# Altium PCB 555_PCB.PcbDoc
Units mm, origin at the board's own origin, x right, y up, seen from the top; angles counter-clockwise.
Board outline 31.4 x 20.2 mm, 2 copper layers (Top Layer, Bottom Layer); 7 components, 7 nets, 26 pads, 7 vias.
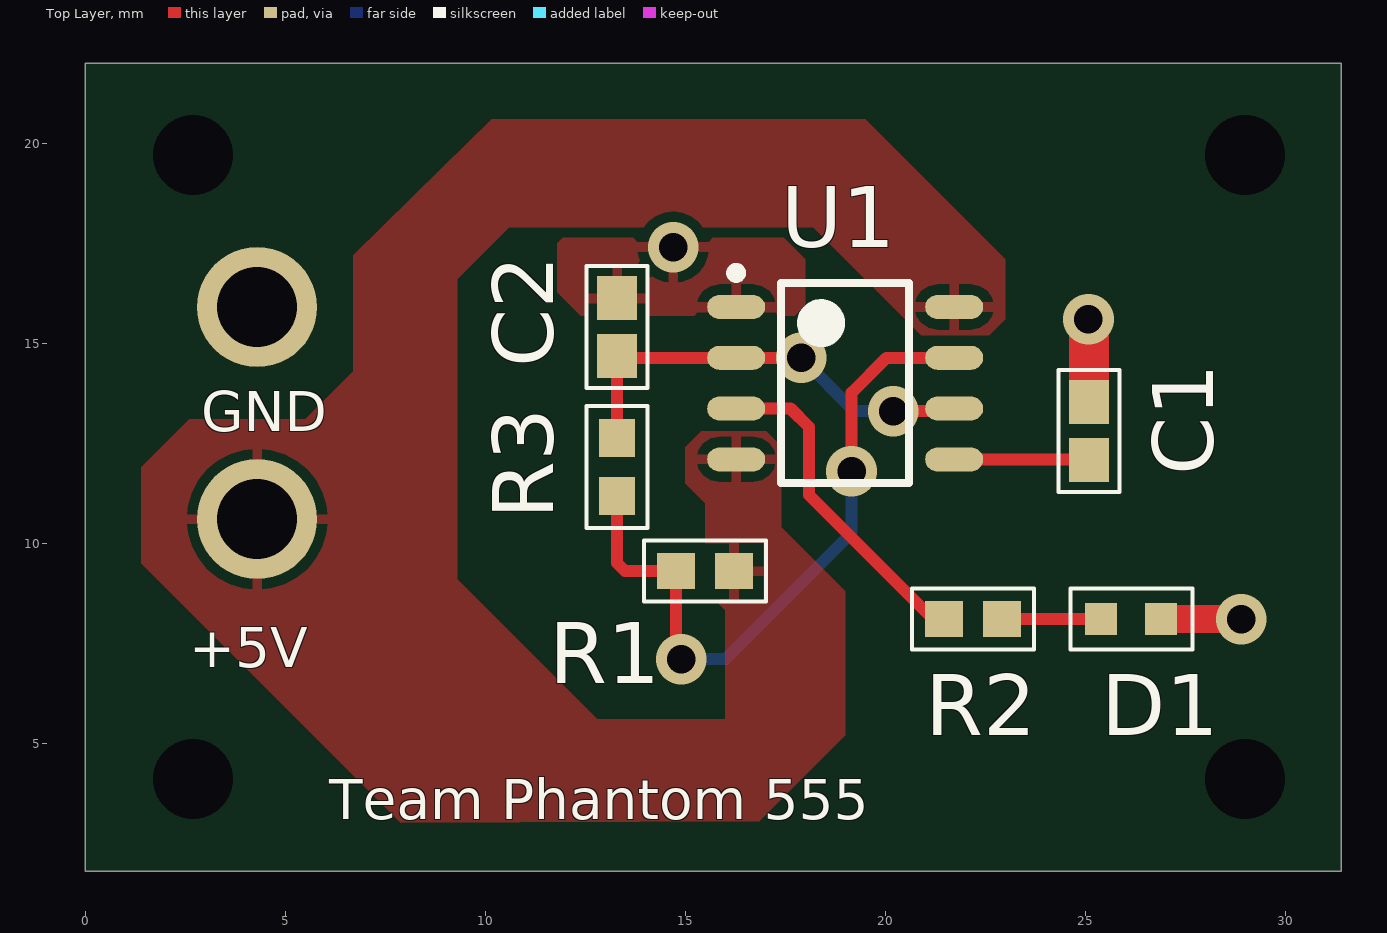
[diagram p0: Top Layer view]
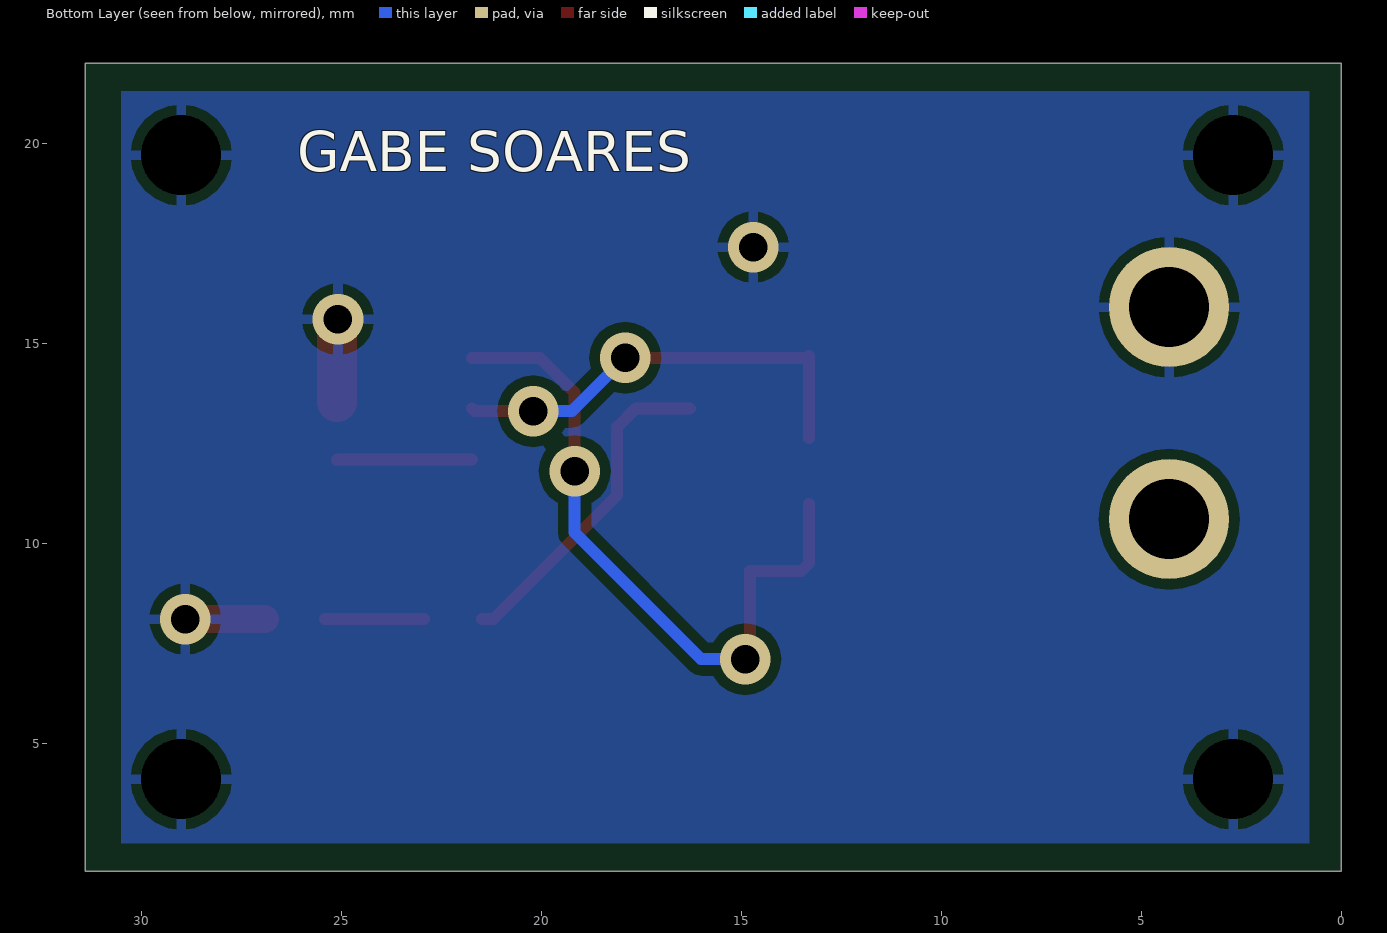
[diagram p1: Bottom Layer view, seen from below]
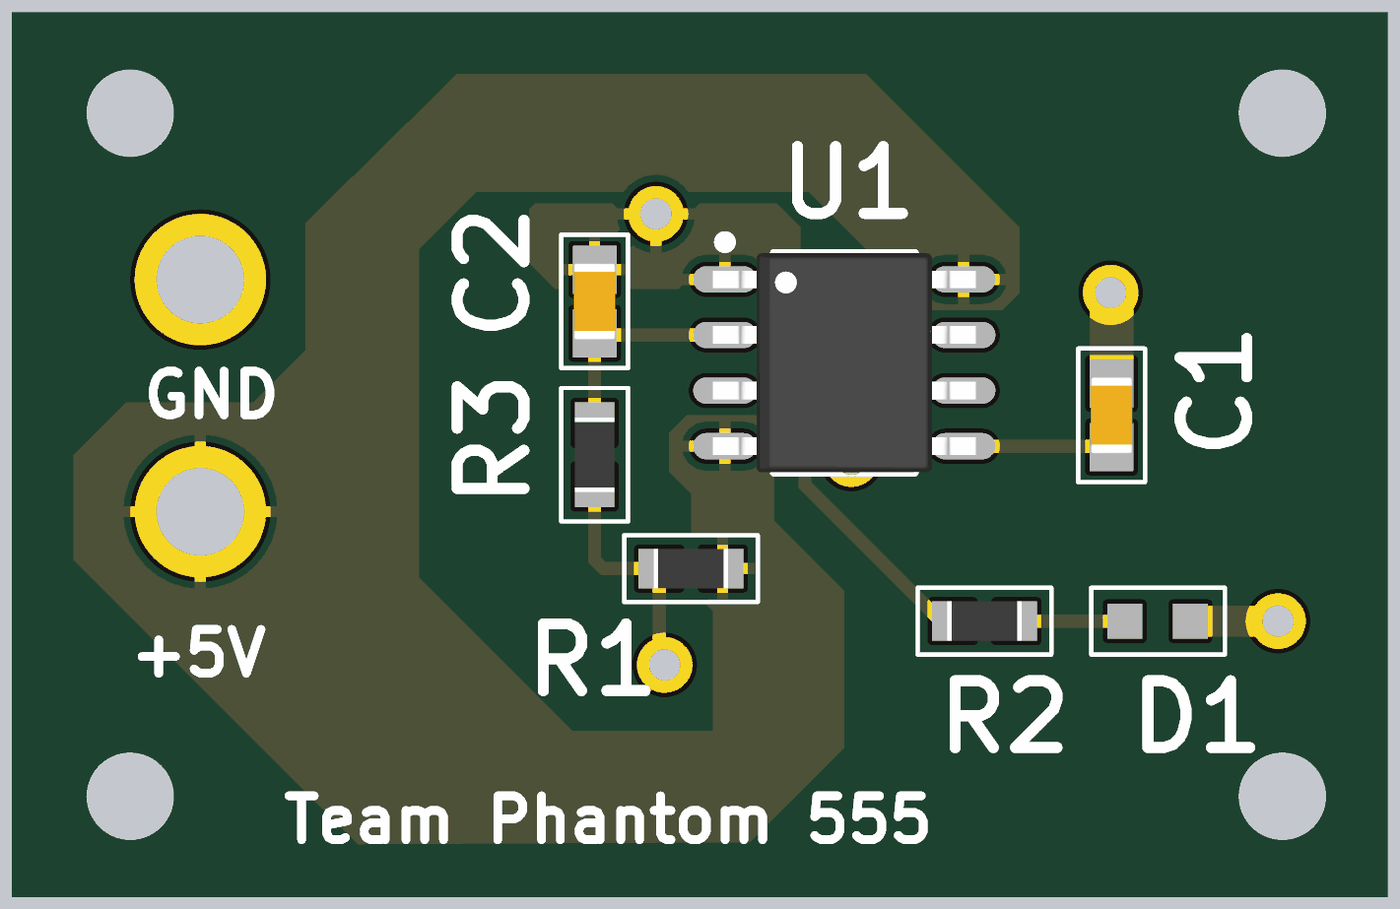
[diagram p2: 3D render of the assembled board from above, using the file's embedded part models]

## Layer stack, top to bottom
Top Solder: solder mask 0.0102, Solder Resist, Dk 3.5
Top Layer: signal copper 0.0356
Dielectric 1: dielectric 0.32, FR-4, Dk 4.8
Bottom Layer: signal copper 0.0356
Bottom Solder: solder mask 0.0102, Solder Resist, Dk 3.5

## Board outline
0,1.8 31.4,1.8 31.4,22 0,22

## Design rules (kind name [scope] priority, off if disabled: settings)
Clearance [All] p1: gap=0.254 ignorepadtopadclearanceinfootprint=FALSE except(0: Arc-Hole Track-Hole SMDPad-Hole THPad-Hole Via-Hole Fill-Hole Poly-Hole Region-Hole Text-Hole)
PolygonConnect [All] p1: connectstyle=Relief reliefconductorwidth=0.254 reliefentries=4 polygonreliefangle="90 Angle" airgapwidth=0.254
RoutingVias [All] p1: holewidth=0.711 width=1.27 viastyle="Through Hole" minholewidth=0.711 minwidth=1.27 maxholewidth=0.711 maxwidth=1.27
SolderMaskExpansion [All] p1: expansion=0.102
Width [All] p1: maxlimit=1 minlimit=0.2 preferedwidth=0.254 minimp=50.000000 maximp=50.000000 favimp=50.000000
30 further rules are at their usual default settings.

## Components (designator, comment, footprint, x,y, rotation, side; value= is the part's Value field where it differs from the comment)
C1 "10nF" C0603 25.1,12.8 r270 top
C2 "10uF" C0603 13.3,15.4 r270 top
D1 "LTST-C190GKT" LED_0603 25.4,8.1 r0 top
R1 "1k" R0603 15.5,9.3 r0 top
R2 "1k" R0603 22.2,8.1 r180 top
R3 "10k" R0603 13.3,11.9 r270 top
U1 "NE555S-13" SOIC-8 19,14 r0 top

## Footprints (in the part's own frame and the unit in brackets; to place one, negate y for a bottom-side part, rotate by r counter-clockwise, add the part's x,y. Pads: shape width x height; smd on the part's side, far side on the other; paste and mask are expansions set on the pad)
C0603 [mm] "Chip Capacitor, 2-Leads, Body 1.60x0.80mm, IPC Medium Density"
  rect 1.1x1 smd: 1(-0.725,0) 2(0.725,0)
  silkscreen extent -1.52,-0.76 1.52,0.76, body extent -0.87,-0.48 0.87,0.48, height 0.95
LED_0603 [mm]
  rect 0.8x0.8 smd: 1(0,0) 2(1.5,0)
  silkscreen extent -0.76,-0.76 2.29,0.76
R0603 [mm] "Chip Resistor, 2-Leads, Body 1.60x0.80mm, IPC Medium Density"
  rect 0.95x0.9 smd: 1(-0.725,0) 2(0.725,0)
  silkscreen extent -1.52,-0.76 1.52,0.76, body extent -0.85,-0.45 0.85,0.45, height 0.55
SOIC-8 [mm] "SOIC, 8-Leads, Body 4.90x3.90mm, Pitch 1.27mm, IPC Medium Density"
  oval 1.45x0.6 smd: 1(-2.725,1.905) 2(-2.725,0.635) 3(-2.725,-0.635) 4(-2.725,-1.905) 5(2.725,-1.905) 6(2.725,-0.635) 7(2.725,0.635) 8(2.725,1.905)
  silkscreen extent -2.85,-2.5 1.6,2.88, body extent -3,-2.5 3,2.5, height 1.75

## Part data
C1: library part CC0603KRX7R6BB103, "Cap Ceramic 0.01uF 10V X7R 10% SMD 0603 125C Paper T/R", Case/Package=0603, Dielectric=X7R, Manufacturer=Yageo, Max Operating Temperature=125°C, Min Operating Temperature=-55°C, Supplier Part Number 1=603-CC603KRX7R6BB103, Tolerance=10%, Voltage Rating=10V, Capacitance=10nF, Composition=Ceramic, Depth=0.8mm, Halogen Free="Halogen Free", Height=0.8mm, Lead Free="Lead Free", Length=0.063inch, Manufacturer Part Number=CC0603KRX7R6BB103, Mount="Surface Mount", Packaging="Tape and Reel", Pricing 1="1=0.1, 10=0.039, 50=0.039, 100=0.018, 1000=0.014, 10000=0.01 (USD)", Radiation Hardening=No, Stock 1=1987, Supplier 1=Mouser, Thickness=0.035inch, Voltage Rating (DC)=10V, Width=0.031inch
C2: library part GRM188R61A106KE69D, "Cap Ceramic 10uF 10V X5R 10% SMD 0603 85C Paper T/R", Case/Package=0603, Case Code (Metric)=1608, Dielectric=X5R, Manufacturer=Murata, Max Operating Temperature=85°C, Min Operating Temperature=-55°C, Supplier Part Number 1=81-GRM188R61A106KE9D, Tolerance=10%, Voltage=10V, Capacitance=10uF, Case Code (Imperial)=0603, Depth=0.8mm, Height=0.8mm, Lead Free="Lead Free", Length=1.6mm, Manufacturer Part Number=GRM188R61A106KE69D, Mount="Surface Mount", Packaging="Tape and Reel", Pricing 1="1=0.19, 10=0.131, 50=0.131, 100=0.066, 1000=0.04, 10000=0.029 (USD)", REACH SVHC="No SVHC", Stock 1=0, Supplier 1=Mouser, Thickness=0.037inch, Voltage Rating=10V, Voltage Rating (DC)=10V, Width=0.031inch
D1: "LED GREEN CLEAR 0603 SMD", Case/Package=0603, Case Code (Metric)=1608, Colour=Green, Current=1A, Forward Current=30mA, Forward Voltage=2.1V, Lens Colour=Clear,Colorless, Manufacturer="Vishay Lite-On", Max Operating Temperature=85°C, Min Operating Temperature=-55°C, Package Quantity=1, Power Dissipation=100mW, Reverse Voltage=5V, Supplier Part Number 1=160-1183-6-ND, Test Current=10mA, Voltage=2V, Case Code (Imperial)=0603, Depth=0.8mm, Dominant Wavelength=569nm, Height=0.8mm, Illumination Colour=Green, Lead Free="Lead Free", Length=1.6mm, Lens Style=Clear,Colorless,Diffused,Rectangular, Lens Transparency=Clear, Luminous Intensity=6mcd, Manufacturer Part Number=LTST-C190GKT, Mount="Surface Mount", Number of Elements=1, Number of LEDs=1, Number of Pins=2, Packaging="Tape and Reel", Power Rating=100mW, Pricing 1="1=0.27, 10=0.196, 25=0.1448, 100=0.1034, 250=0.07032, 500=0.06204, 1000=0.0486 (USD)", Radiation Hardening=No, Stock 1=1795364, Supplier 1=Digi-Key, Viewing Angle=130°, Wavelength=565nm, Width=0.8mm
R1 R2: library part ESR03EZPJ102, "RES SMD 1K OHM 5% 1/4W 0603", Case/Package=0603, Case Code (Metric)=1608, Manufacturer=Rohm, Max Operating Temperature=155°C, Max Power Dissipation=250mW, Min Operating Temperature=-55°C, Package Quantity=1, Resistance=1kR, Supplier Part Number 1=2103938, Temperature Coefficient=200ppm/°C, Tolerance=5%, Case Code (Imperial)=0603, Composition="Thick Film", Features="Automotive AEC-Q200", Height=0.022inch, Lead Free="Lead Free", Length=0.063inch, Manufacturer Part Number=ESR03EZPJ102, Number of Terminations=2, Packaging="Tape and Reel", Pricing 1="1=0.022, 250=0.0157, 750=0.0138, 1500=0.0122, 2500=0.011 (USD)", Stock 1=0, Supplier 1="Future Electronics", Width=0.031inch
R3: library part RR0816P-103-D, "RES SMD 10K OHM 0.5% 1/16W 0816", Case/Package=0603, Case Code (Metric)=1608, Manufacturer=Susumu, Max Operating Temperature=125°C, Max Power Dissipation=63mW, Min Operating Temperature=-55°C, Package Quantity=1, Resistance=10kR, Temperature Coefficient=25ppm/°C, Tolerance=0.5%, Voltage Rating=75V, Case Code (Imperial)=0603, Composition="Thin Film", Depth=0.8mm, Height=0.4mm, Lead Free="Lead Free", Length=1.6mm, Manufacturer Part Number=RR0816P-103-D, Number of Pins=2, Number of Terminations=2, Packaging="Tape and Reel", Power Rating=63mW, Pricing 1="1=0.09, 10=0.045, 25=0.0405, 100=0.0198, 250=0.0178, 500=0.016 (USD)", REACH SVHC=Unknown, Stock 1=7768, Supplier 1=Arrow, Supplier Part Number 1=RR0816P-103-D, Termination=SMD/SMT, Voltage Rating (DC)=75V, Weight=7.1E-05oz, Width=0.8mm
U1: "555 Type, Timer/Oscillator (Single) IC 500kHz 8-SOIC (0.154\", 3.90mm Width)", Case/Package=SO, Frequency=500kHz, High Level Output Current=-200mA, Low Level Output Current=200mA, Manufacturer=Diodes, Max Operating Temperature=70°C, Max Supply Voltage=16V, Min Operating Temperature=0°C, Min Supply Voltage=4.5V, Operating Supply Current=13mA, Package Quantity=2500, Quiescent Current=15mA, Supplier Part Number 1=NE555S-13DIDKR-ND, ComponentLink1Description=https://datasheet.ciiva.com/1232/ne555-sa555-na555-1232519.pdf, ComponentLink1URL=https://datasheet.ciiva.com/1232/ne555-sa555-na555-1232519.pdf, ComponentLink2Description=https://datasheet.ciiva.com/1232/ne555-sa555-na555-1232520.pdf, ComponentLink2URL=https://datasheet.ciiva.com/1232/ne555-sa555-na555-1232520.pdf, ComponentLink3Description=https://datasheet.ciiva.com/1232/ne555-sa555-na555-1232521.pdf, ComponentLink3URL=https://datasheet.ciiva.com/1232/ne555-sa555-na555-1232521.pdf, Contact Plating=Tin,Matte, Height=1.5mm, Lead Free="Lead Free", Length=4.95mm, Manufacturer Part Number=NE555S-13, Mount="Surface Mount", Number of Pins=8, Number of Timers/Counters=1, Packaging="Tape and Reel", Pricing 1="1=0.37, 10=0.303, 100=0.206, 500=0.15452, 1000=0.11588 (USD)", Radiation Hardening=No, REACH SVHC="No SVHC", Stock 1=2624, Supplier 1=Digi-Key, Weight=0.01787oz, Width=3.95mm

## Free pads (board coordinates)
  round 3 hole 2: 1(4.3,10.6) 2(4.3,15.9)
  round 0 hole 2 unplated: 6(2.7,19.7) 7(2.7,4.1) 8(29,4.1) 9(29,19.7)

## Via types
v1: diameter 1.27, hole 0.711, Top Layer to Bottom Layer, 7 vias

## Nets (pads, with @x,y where several pads share a name; then routed paths per layer and width w, separated by ;. In a path a pad name is that pad's centre, name@x,y a point inside that pad or via, vN(x,y) a via of type N, cw(c..) or ccw(c..) an arc to the next point about the centre after c; other vN are vias at no path point)
+5V: pad.1 R1.2 U1.4 U1.8
COMPARATOR: C1.2 U1.5 | length 3.4
  Top Layer w0.3: U1.5 25.08,12.095 C1.2
DISCHARGE: R1.1 R3.2 U1.7 | length 17.3
  Top Layer w0.3: R3.2@13.3,10.975 13.3,9.5 13.5,9.3 R1.1 14.775,7.225 v1(14.9,7.1) ; v1(19.161,11.8) 19.161,13.761 20.035,14.635 U1.7
  Bottom Layer w0.3: v1(14.9,7.1) 16,7.1 19.161,10.261 v1(19.161,11.8)
GND: C1.1 C2.1 D1.2 pad.2 pad.6 pad.7 pad.8 pad.9 U1.1 | length 4.1
  Top Layer w0.7: D1.2 v1(28.9,8.1)
  Top Layer w1: v1(25.08,15.6) 25.1,15.58 C1.1
  other v1: 14.7,17.4
LED_DRIVE: D1.1 R2.1 | length 2.5
  Top Layer w0.3: R2.1 D1.1
OUTPUT: R2.2 U1.3 | length 8.4
  Top Layer w0.3: U1.3 17.635,13.365 18.1,12.9 18.1,11.2 21.2,8.1 R2.2
TRIG: C2.2 R3.1 U1.2 U1.6 | length 10.8
  Top Layer w0.3: R3.1 C2.2 13.34,14.635 U1.2 v1@17.665,14.635 ; v1(20.2,13.3) 21.66,13.3 U1.6
  Bottom Layer w0.3: v1(17.9,14.635) 19.235,13.3 v1(20.2,13.3)

## Polygon pours and split planes (outlines as drawn)
GND on Top Layer (solid, pour order 2): 12.3,18 11.8,17.5 11.8,16.278 12.389,15.689 12.806,15.689 17.739,15.689 18,15.95 18,17.1 17.1,18
+5V on Top Layer (solid, pour order 0): 1.4,11.9 2.6,13.1 5.5,13.1 6.7,14.3 6.7,17.2 8.925,19.386 10.162,20.6 19.5,20.6 23,17.1 23,15.6 22.6,15.2 20.9,15.2 18.2,17.9 10.6,17.9 9.3,16.6 9.3,9.1 12.8,5.6 16,5.6 16,8.325 15.5,8.825 15.5,11 15,11.5 15,12.4 15.4,12.8 17.025,12.8 17.4,12.425 17.4,10.4 19,8.8 19,5.2 16.85,3.05 7.895,3.005 1.4,9.5
GND on Bottom Layer "GND" (solid, pour order 4): 0.8,21.3 0.8,2.5 30.5,2.5 30.5,21.3

## Silkscreen, mask and mechanical layers (free items; w line width, h text height)
Top Overlay:
  text "GND" at 2.9,12.8 h1
  text "+5V" at 2.6,6.9 h1
  text "Team Phantom 555" at 6.1,3.1 h1
Bottom Overlay:
  text "GABE SOARES" at 26.1,19.3 h1
Mechanical 13:
  the board outline again, w0.1